# EAGLE board CPU (EAGLE 9.6.1)
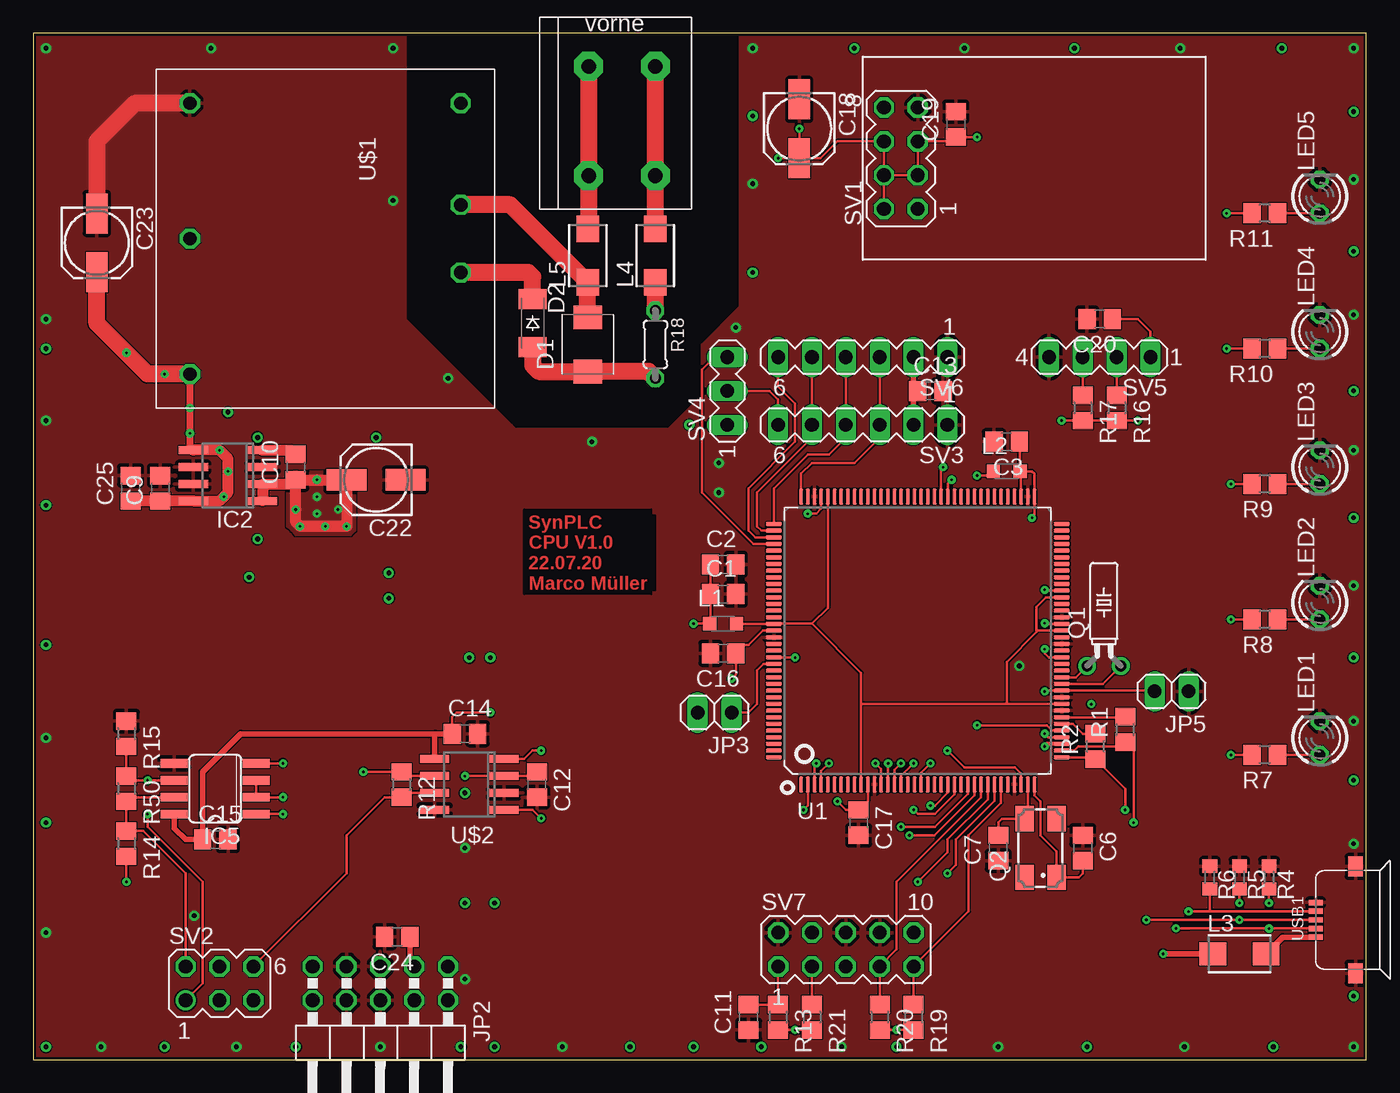
[diagram p0: board, top side]
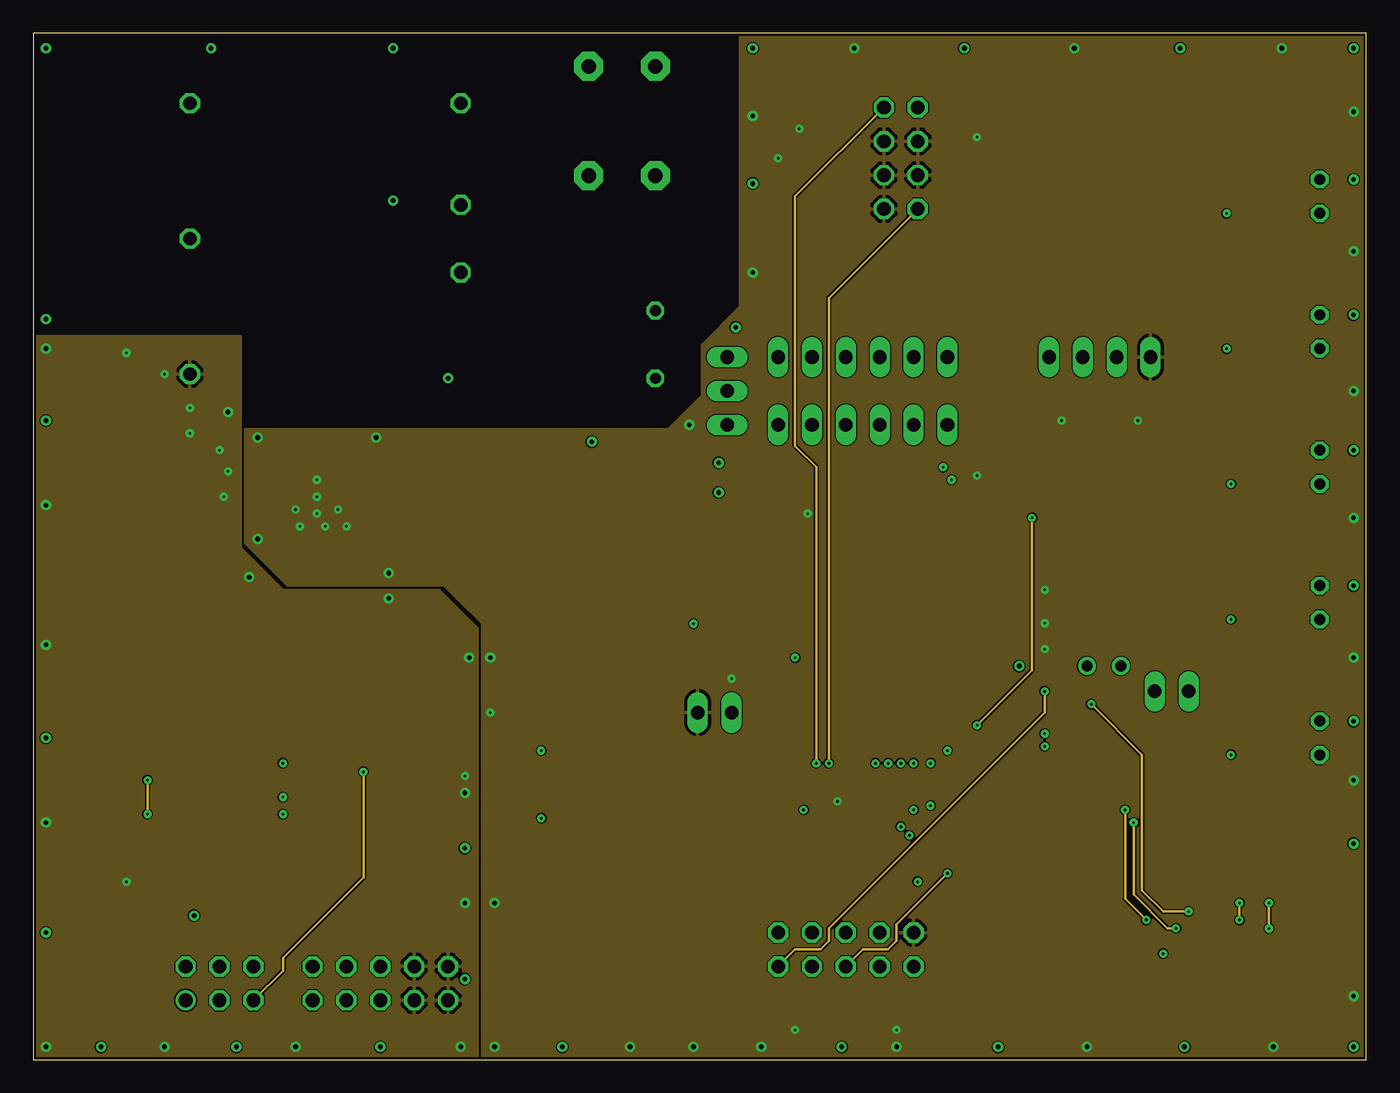
[diagram p1: board, inner layer Route2]
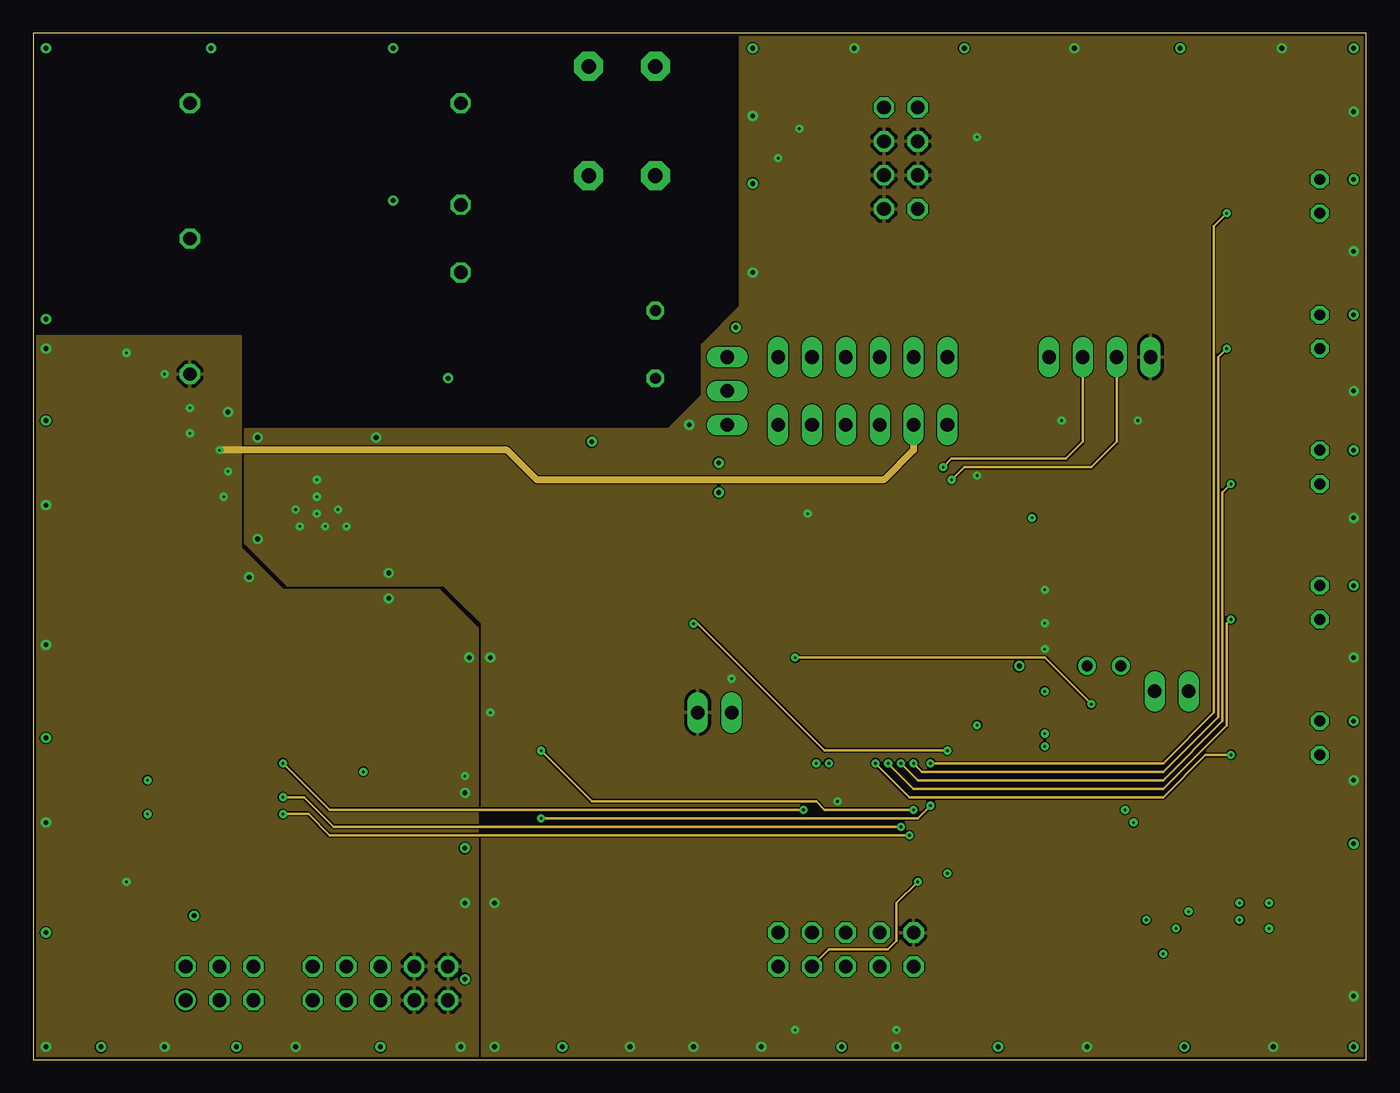
[diagram p2: board, inner layer Route15]
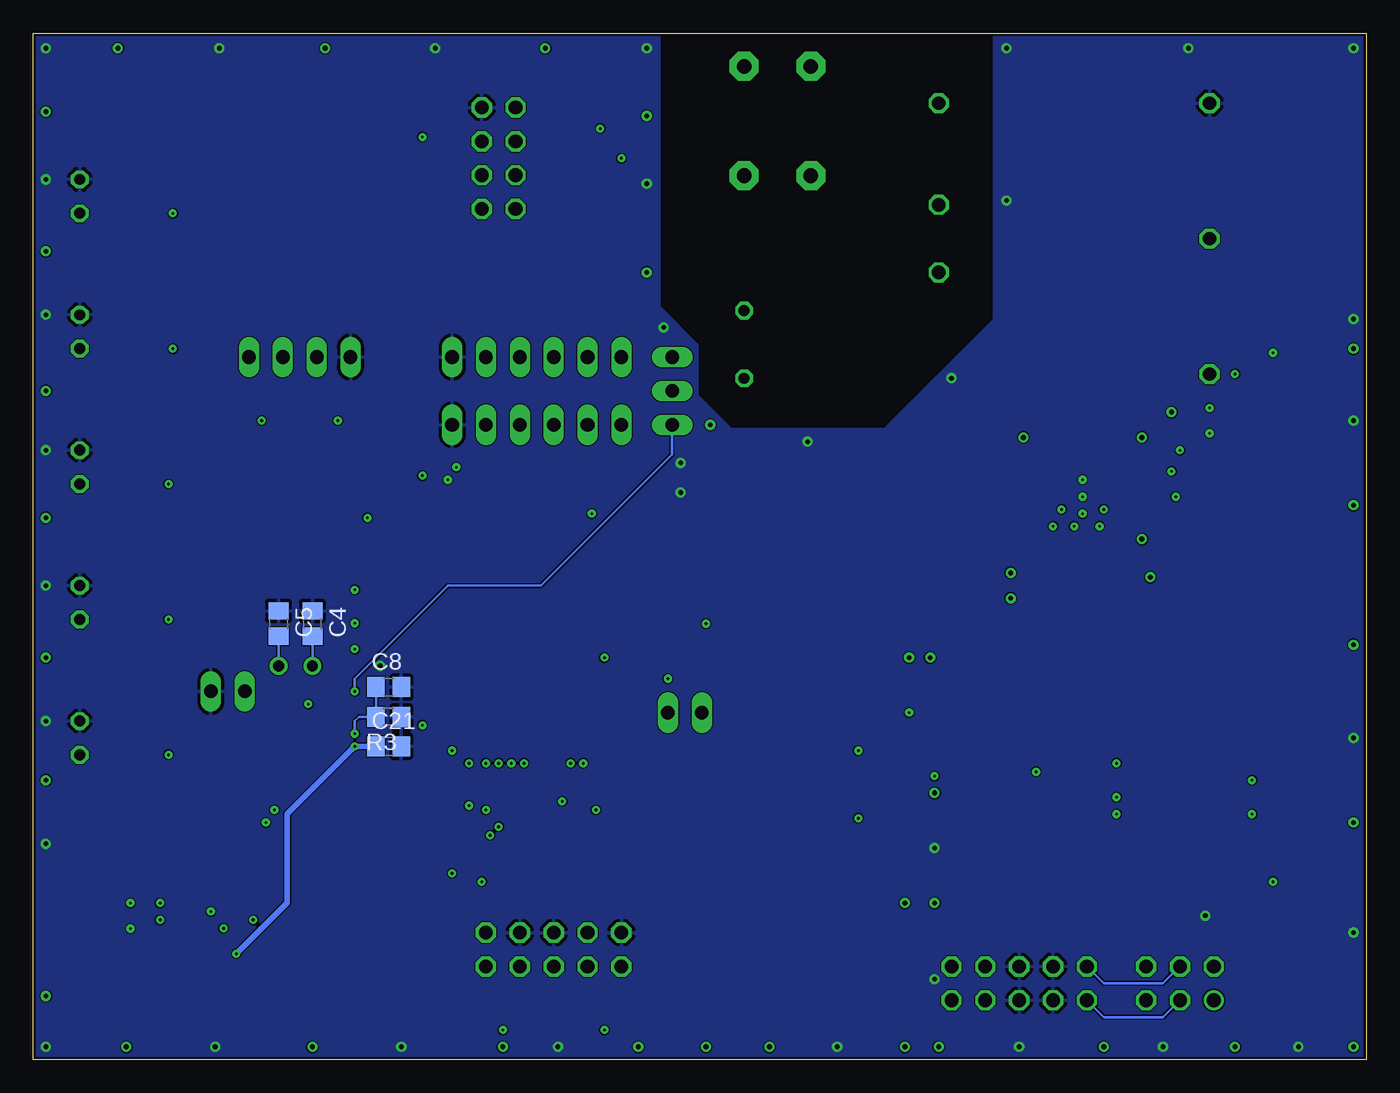
[diagram p3: board, bottom side, seen from below]

Size 100 x 77 mm. Coordinates in mm from the lower left corner, seen from the top.
Outline: 0,0 100,0 100,77 0,77 0,0
Copper layers (1+2*15+16): Top 0.035mm / dielectric 0.2mm / Route2 0.035mm / dielectric 1mm / Route15 0.035mm / dielectric 0.2mm / Bottom 0.035mm
Design rules "jlc *": minimum track width 3.5mil, minimum drill 0.2mm, track to track 3.5mil, track to pad 6mil, pad to pad 6mil, via to via 6mil, smd to smd 6mil, copper to edge 0.2mm, drill to drill 6mil, minimum pad ring 10mil, minimum via ring 8mil, stop-mask expansion 4mil, vias tented up to drill 0mil, thermal gap 10mil
tKeepout: 7 lines
tRestrict: 4 lines

## Footprints (pad centres in the part's own frame; a part is rotated, then mirrored left to right if it is on the bottom)
C0805 = smd 1.3 x 1.5: 1 -0.95,0; 2 0.95,0
153CLV-0505 = smd 3 x 1.6: + 2.2,0; - -2.2,0
SMBJ = smd 1.78 x 2.16: A 2.04,0; C -2.03,0
SOD-123_MINI-SMA = smd 1.5 x 2.1: A 1.8,0; C -1.8,0
SOIC8 = smd 0.6 x 2.2: 1 -1.905,-2.6; 2 -0.635,-2.6; 3 0.635,-2.6; 4 1.905,-2.6; 5 1.905,2.6; 6 0.635,2.6; 7 -0.635,2.6; 8 -1.905,2.6
SO08 = smd 0.66 x 2.032: 1 -1.905,-3.073; 2 -0.635,-3.073; 3 0.635,-3.073; 4 1.905,-3.073; 5 1.905,3.073; 6 0.635,3.073; 7 -0.635,3.073; 8 -1.905,3.073
2X05/90 = drill 1.016 octagon: 1 -5.08,-6.35; 2 -5.08,-3.81; 3 -2.54,-6.35; 4 -2.54,-3.81; 5 0,-6.35; 6 0,-3.81; 7 2.54,-6.35; 8 2.54,-3.81; 9 5.08,-6.35; 10 5.08,-3.81
1X02 = drill 1.016 long: 1 -1.27,0; 2 1.27,0
L2012C = smd 1 x 1: 1 -1,0; 2 1,0
SM-B5 = smd 2 x 1.7: 1 -2,0; 2 2,0
LED3MM = drill 0.813 octagon: A -1.27,0; K 1.27,0
TC26H = drill 0.813: 1 -1.27,0; 2 1.27,0
CTS406 = smd 1.9 x 1.4: 1 -2.2,-1.2; 2 2.2,-1.2; 3 2.2,1.2; 4 -2.2,1.2
R0805 = smd 1.3 x 1.5: 1 -0.95,0; 2 0.95,0
R0603 = smd 1 x 1.1: 1 -0.85,0; 2 0.85,0
0204/5 = drill 0.813 octagon: 1 -2.54,0; 2 2.54,0
MA04-2 = drill 1.016 octagon: 1 -3.81,-1.27; 2 -3.81,1.27; 3 -1.27,-1.27; 4 -1.27,1.27; 5 1.27,-1.27; 6 1.27,1.27; 7 3.81,-1.27; 8 3.81,1.27
MA03-2 = drill 1.016: 1 -2.54,-1.27 | drill 1.016 octagon: 2 -2.54,1.27; 3 0,-1.27; 4 0,1.27; 5 2.54,-1.27; 6 2.54,1.27
MA06-1 = drill 1.016 long: 1 -6.35,0; 2 -3.81,0; 3 -1.27,0; 4 1.27,0; 5 3.81,0; 6 6.35,0
MA03-1 = drill 1.016 long: 1 -2.54,0; 2 0,0; 3 2.54,0
MA04-1 = drill 1.016 long: 1 -3.81,0; 2 -1.27,0; 3 1.27,0; 4 3.81,0
MA05-2 = drill 1.016 octagon: 1 -5.08,-1.27; 2 -5.08,1.27; 3 -2.54,-1.27; 4 -2.54,1.27; 5 0,-1.27; 6 0,1.27; 7 2.54,-1.27; 8 2.54,1.27; 9 5.08,-1.27; 10 5.08,1.27
LQFP144-0.5-20X20M = smd 0.3 x 1.2: 1 -8.75,-10.8; 2 -8.25,-10.8; 3 -7.75,-10.8; 4 -7.25,-10.8; 5 -6.75,-10.8; 6 -6.25,-10.8; 7 -5.75,-10.8; 8 -5.25,-10.8; 9 -4.75,-10.8; 10 -4.25,-10.8; 11 -3.75,-10.8; 12 -3.25,-10.8; 13 -2.75,-10.8; 14 -2.25,-10.8; 15 -1.75,-10.8; 16 -1.25,-10.8; 17 -0.75,-10.8; 18 -0.25,-10.8; 19 0.25,-10.8; 20 0.75,-10.8; 21 1.25,-10.8; 22 1.75,-10.8; 23 2.25,-10.8; 24 2.75,-10.8; 25 3.25,-10.8; 26 3.75,-10.8; 27 4.25,-10.8; 28 4.75,-10.8; 29 5.25,-10.8; 30 5.75,-10.8; 31 6.25,-10.8; 32 6.75,-10.8; 33 7.25,-10.8; 34 7.75,-10.8; 35 8.25,-10.8; 36 8.75,-10.8; 73 8.75,10.8; 74 8.25,10.8; 75 7.75,10.8; 76 7.25,10.8; 77 6.75,10.8; 78 6.25,10.8; 79 5.75,10.8; 80 5.25,10.8; 81 4.75,10.8; 82 4.25,10.8; 83 3.75,10.8; 84 3.25,10.8; 85 2.75,10.8; 86 2.25,10.8; 87 1.75,10.8; 88 1.25,10.8; 89 0.75,10.8; 90 0.25,10.8; 91 -0.25,10.8; 92 -0.75,10.8; 93 -1.25,10.8; 94 -1.75,10.8; 95 -2.25,10.8; 96 -2.75,10.8; 97 -3.25,10.8; 98 -3.75,10.8; 99 -4.25,10.8; 100 -4.75,10.8; 101 -5.25,10.8; 102 -5.75,10.8; 103 -6.25,10.8; 104 -6.75,10.8; 105 -7.25,10.8; 106 -7.75,10.8; 107 -8.25,10.8; 108 -8.75,10.8 | smd 1.2 x 0.3: 37 10.8,-8.75; 38 10.8,-8.25; 39 10.8,-7.75; 40 10.8,-7.25; 41 10.8,-6.75; 42 10.8,-6.25; 43 10.8,-5.75; 44 10.8,-5.25; 45 10.8,-4.75; 46 10.8,-4.25; 47 10.8,-3.75; 48 10.8,-3.25; 49 10.8,-2.75; 50 10.8,-2.25; 51 10.8,-1.75; 52 10.8,-1.25; 53 10.8,-0.75; 54 10.8,-0.25; 55 10.8,0.25; 56 10.8,0.75; 57 10.8,1.25; 58 10.8,1.75; 59 10.8,2.25; 60 10.8,2.75; 61 10.8,3.25; 62 10.8,3.75; 63 10.8,4.25; 64 10.8,4.75; 65 10.8,5.25; 66 10.8,5.75; 67 10.8,6.25; 68 10.8,6.75; 69 10.8,7.25; 70 10.8,7.75; 71 10.8,8.25; 72 10.8,8.75; 109 -10.8,8.75; 110 -10.8,8.25; 111 -10.8,7.75; 112 -10.8,7.25; 113 -10.8,6.75; 114 -10.8,6.25; 115 -10.8,5.75; 116 -10.8,5.25; 117 -10.8,4.75; 118 -10.8,4.25; 119 -10.8,3.75; 120 -10.8,3.25; 121 -10.8,2.75; 122 -10.8,2.25; 123 -10.8,1.75; 124 -10.8,1.25; 125 -10.8,0.75; 126 -10.8,0.25; 127 -10.8,-0.25; 128 -10.8,-0.75; 129 -10.8,-1.25; 130 -10.8,-1.75; 131 -10.8,-2.25; 132 -10.8,-2.75; 133 -10.8,-3.25; 134 -10.8,-3.75; 135 -10.8,-4.25; 136 -10.8,-4.75; 137 -10.8,-5.25; 138 -10.8,-5.75; 139 -10.8,-6.25; 140 -10.8,-6.75; 141 -10.8,-7.25; 142 -10.8,-7.75; 143 -10.8,-8.25; 144 -10.8,-8.75
THN10WIR = drill 1 octagon: 1 15.24,22.86; 2 10.16,22.86; 3 2.54,22.86; 4 22.86,2.54; 5 12.7,2.54; 6 2.54,2.54
SO-08 = smd 0.6 x 2.2: 1 -1.905,-2.6; 2 -0.635,-2.6; 3 0.635,-2.6; 4 1.905,-2.6; 5 1.905,2.6; 6 0.635,2.6; 7 -0.635,2.6; 8 -1.905,2.6
MICRO-USB5+2P-SMD-0.65 = smd 0.4 x 1.05: 1 -1.3,0; 2 -0.65,0; 3 0,0; 4 0.65,0; 5 1.3,0 | smd 1.5 x 1.1: 6 4,-3; 7 -4,-3
SPT2 = drill 1.1 pad 2.184 octagon: 1.1 7.3,10.7; 1.2 7.3,2.5; 2.1 2.3,10.7; 2.2 2.3,2.5

## Placement (x,y rotation side)
C1  100n  [C0805]  51.75,34.92 0 top
C2  10µ  [C0805]  51.75,37.15 0 top
C3  100n  [C0805]  73.03,46.35 180 top
C4  22p  [C0805]  79.06,32.7 270 bottom
C5  22p  [C0805]  81.6,32.7 270 bottom
C6  22p  [C0805]  78.74,15.88 270 top
C7  22p  [C0805]  72.39,15.88 90 top
C8  22p  [C0805]  73.34,27.94 0 bottom
C9  1µ  [C0805]  9.53,42.86 90 top
C10  100n  [C0805]  19.68,44.45 90 top
C11  100n  [C0805]  53.66,3.17 90 top
C12  100n  [C0805]  37.78,20.64 270 top
C13  100n  [C0805]  67.31,50.16 0 top
C14  100n  [C0805]  32.38,24.45 0 top
C15  100n  [C0805]  13.65,16.51 0 top
C16  100n  [C0805]  51.75,30.48 180 top
C17  100n  [C0805]  61.91,17.78 270 top
C18  100µ  [153CLV-0505]  57.47,69.85 270 top
C19  100n  [C0805]  69.22,70.17 90 top
C20  100n  [C0805]  80.01,55.56 180 top
C21  100n  [C0805]  73.34,23.5 0 bottom
C22  100µ  [153CLV-0505]  25.72,43.5 180 top
C23  100µ  [153CLV-0505]  4.76,61.28 270 top
C24  100n  [C0805]  27.3,9.21 180 top
C25  100n  [C0805]  7.3,42.86 90 top
D1  [SMBJ]  41.59,53.66 90 top
D2  CGRM4001-G  [SOD-123_MINI-SMA]  37.47,55.24 270 top
IC2  LT1763CS8-3.3  [SOIC8]  14.61,43.81 90 top
IC5  MAX485CSA  [SO08]  13.65,20.32 90 top
JP2  [2X05/90]  26.04,0.64 180 top
JP3  [1X02]  51.12,26.04 180 top
JP5  [1X02]  85.41,27.62 180 top
L1  MH2029-300Y  [L2012C]  51.75,32.7 0 top
L2  MH2029-300Y  [L2012C]  73.03,44.13 0 top
L3  [SM-B5]  90.49,7.94 0 top
L4  [SM-B5]  46.67,60.33 90 top
L5  [SM-B5]  41.59,60.33 90 top
LED1  [LED3MM]  96.52,24.13 90 top
LED2  [LED3MM]  96.52,34.29 90 top
LED3  [LED3MM]  96.52,44.45 90 top
LED4  [LED3MM]  96.52,54.61 90 top
LED5  [LED3MM]  96.52,64.77 90 top
Q1  428-200125-PL08  [TC26H]  80.33,29.53 0 top
Q2  406I35E12M00000  [CTS406]  75.56,15.88 90 top
R1  39R 1%  [R0805]  81.92,24.77 90 top
R2  39R 1%  [R0805]  79.69,23.5 90 top
R3  6k8 1%  [R0805]  73.34,25.72 180 bottom
R4  CG0603MLC-05E  [R0603]  92.71,13.65 270 top
R5  CG0603MLC-05E  [R0603]  90.49,13.65 270 top
R6  CG0603MLC-05E  [R0603]  88.27,13.65 270 top
R7  220  [R0805]  92.39,22.86 180 top
R8  220  [R0805]  92.39,33.02 180 top
R9  220  [R0805]  92.39,43.18 180 top
R10  220  [R0805]  92.39,53.34 180 top
R11  220  [R0805]  92.39,63.5 180 top
R12  120  [R0805]  27.62,20.64 270 top
R13  10k  [R0805]  55.88,3.17 270 top
R14  330  [R0805]  6.99,16.19 270 top
R15  330  [R0805]  6.99,24.45 270 top
R16  3k3  [R0805]  81.28,48.9 270 top
R17  3k3  [R0805]  78.74,48.9 270 top
R18  60R065XU  [0204/5]  46.67,53.66 270 top
R19  100k  [R0805]  66.04,3.17 270 top
R20  100k  [R0805]  63.5,3.17 270 top
R21  100k  [R0805]  58.42,3.17 270 top
R50  150  [R0805]  6.99,20.32 270 top
SV1  ESP01  [MA04-2]  65.09,67.63 90 top
SV2  [MA03-2]  13.97,5.71 0 top
SV3  [MA06-1]  62.23,47.62 180 top
SV4  [MA03-1]  52.07,50.16 90 top
SV5  [MA04-1]  80.01,52.7 180 top
SV6  [MA06-1]  62.23,52.7 180 top
SV7  [MA05-2]  60.96,8.26 0 top
U1  ATSAM3X8EA-AU-ND-LQFP144  [LQFP144-0.5-20X20M]  66.36,31.43 0 top
U$1  THN_10WIR  [THN10WIR]  9.21,74.3 270 top
U$2  TCAN1044VDRQ1  [SO-08]  32.7,20.64 90 top
USB1  ST-USB-001L  [MICRO-USB5+2P-SMD-0.65]  96.2,10.48 90 top
X1  SPT2.5/2-H-5.0  [SPT2]  39.37,63.82 0 top

## Library data of the parts
C1-C25 = rcl; SPICEPREFIX: C
D1 D2 = diode
IC2 = linear-technology; MPN: LT1763CS8-3.3; OC_FARNELL: 1273617; OC_NEWARK: 57M6055
IC5 = maxim; MF: MAXIM; MPN: MAX481CSA; OC_FARNELL: unknown; OC_NEWARK: 90C3817
JP2 JP3 JP5 = pinhead
L1 L2 = rcl; SPICEPREFIX: L
L3-L5 = inductor-neosid; OC_FARNELL: unknown; OC_NEWARK: unknown
LED1-LED5 = led
Q1 Q2 = crystal; OC_FARNELL: unknown; OC_NEWARK: unknown
R1-R21 R50 = rcl; SPICEPREFIX: R
SV1-SV7 = con-lstb; OC_FARNELL: unknown; OC_NEWARK: unknown
U1 = Seeed-OPL-ic; MPN: ATSAM3X8EA-AU-ND
U$1 = traco-electronic
U$2 = texas
USB1 = Seeed-OPL-Connector; MPN: ST-USB-001L
X1 = con-phoenix-500

## Nets
0V: D1.A L5.1 U$1.2
4_/CS: SV4.3 U1.112
10_/CS1: SV6.6 U1.111
24V: D2.C U$1.1
25_BOOT: R7.2 U1.13
26_ERROR: R8.2 U1.14
27_RUN: R9.2 U1.15
28_HEARTBEAT: R10.2 U1.16
29_FLASH: R11.2 U1.19
+3V3: C10.1 C14.1 C15.1 C16.1 C17.1 C18.+ C19.1 C20.1 C22.+ IC2.1 IC2.2 IC5.8 JP3.2 L2.1 R13.2 R16.2 R17.2 R19.2 R20.2 R21.2 SV1.2 SV1.3 SV1.4 SV1.5 SV1.6 SV5.1 SV7.10 U1.11 U1.52 U1.57 U1.62 U1.105 U1.125 U$2.5
+5V: C9.1 C12.1 C13.1 C23.+ C24.1 C25.1 IC2.5 IC2.8 JP2.1 JP2.2 JP2.3 JP2.4 R14.2 SV3.2 SV6.2 U$1.4 U$2.3
B+: IC5.7 R14.1 R50.2 SV2.2
B-: IC5.6 R15.2 R50.1 SV2.1
BUS+: JP2.9 SV2.4
BUS-: JP2.10 SV2.3
CANH: R12.2 SV2.6 U$2.7
CANL: R12.1 SV2.5 U$2.6
CANRX: U1.24 U$2.4
CANTX: U1.23 U$2.1
CS: SV3.6 SV4.2
D+: R2.1 R5.2 U1.37 USB1.3
D-: R1.1 R4.2 U1.38 USB1.2
DIR: IC5.2 IC5.3 U1.26
ESPRX: SV1.8 U1.3
ESPTX: SV1.1 U1.4
GND: C1.2 C2.2 C3.2 C4.1 C5.1 C6.1 C7.1 C8.2 C9.2 C11.1 C12.2 C13.2 C14.2 C15.2 C16.2 C17.2 C18.- C19.2 C20.2 C21.2 C22.- C23.- C24.2 C25.2 IC2.3 IC2.6 IC2.7 IC5.5 JP2.5 JP2.6 JP2.7 JP2.8 JP5.1 LED1.K LED2.K LED3.K LED4.K LED5.K R3.1 R4.1 R5.1 R6.1 R15.1 SV1.7 SV3.1 SV5.4 SV6.1 SV7.2 SV7.6 SV7.8 U1.12 U1.33 U1.44 U1.46 U1.54 U1.58 U1.74 U1.106 U1.126 U$1.6 U$2.2 U$2.8 USB1.5 USB1.6 USB1.7
ID: R6.2 U1.129 USB1.4
MISO: SV3.3 SV6.3 U1.108
MOSI: SV3.4 SV6.4 U1.109
N$1: L1.2 U1.10 U1.45 U1.56 U1.61 U1.104 U1.124
N$2: C1.1 C2.1 L1.1 U1.34
N$3: C3.1 L2.2 U1.41 U1.73 U1.75
N$4: C5.2 Q1.2 U1.48
N$5: C4.2 Q1.1 U1.49
N$6: C8.1 R3.2 U1.40
N$7: JP3.1 U1.130
N$8: C10.2 IC2.4
N$9: C7.2 Q2.3 U1.35
N$10: C6.2 Q2.1 U1.36
N$11: LED1.A R7.1
N$12: LED2.A R8.1
N$13: R2.2 U1.42
N$14: R1.2 U1.43
N$15: LED3.A R9.1
N$16: LED4.A R10.1
N$17: LED5.A R11.1
N$18: L3.2 USB1.1
N$19: L4.2 X1.1.1 X1.1.2
N$20: L5.2 X1.2.1 X1.2.2
N$21: L4.1 R18.1
N$22: D1.C D2.A R18.2
RESET: C11.2 JP5.2 R13.1 SV4.1 SV7.1 U1.47
RXD: IC5.1 U1.27
SCK: SV3.5 SV6.5 U1.110
SCL: R17.1 SV5.3 U1.87
SDA: R16.1 SV5.2 U1.86
TCK: R20.1 SV7.7 U1.28
TDI: R21.1 SV7.3 U1.29
TDO: SV7.5 U1.30
TMS: R19.1 SV7.9 U1.31
TXD: IC5.4 U1.2
VBUS: C21.1 L3.1 U1.39

## Tracks (layer width: path | path; a pad name or v marks a point on that pad's centre or on a via)
0V
  Top 1.27: D1.A L5.1 35.78,64.14 U$1.2
4_/CS
  Top 0.203: U1.112 54.03,38.68 50.16,42.55 50.16,51.75 51.12,52.7 SV4.3
10_/CS1
  Top 0.203: U1.111 54.16,39.18 53.66,39.69 53.66,42.86 57.15,46.35 57.15,49.21 55.88,50.48 SV6.6
24V
  Top 1.27: D2.C 37.47,58.74 37.15,59.05 U$1.1
25_BOOT  (via drill 0.2)
  Top 0.203: U1.13 63.61,21.8 v63.18,22.23 | v89.85,22.86 R7.2
  Route15 0.203: v63.18,22.23 65.72,19.68 84.77,19.68 87.95,22.86 v89.85,22.86
26_ERROR  (via drill 0.2)
  Top 0.203: U1.14 64.11,22.2 v64.14,22.23 | v89.85,33.02 R8.2
  Route15 0.203: v64.14,22.23 66.04,20.32 84.77,20.32 89.53,25.08 89.53,32.7 v89.85,33.02
27_RUN  (via drill 0.2)
  Top 0.203: v65.09,22.23 64.61,21.75 U1.15 | v89.85,43.18 R9.2
  Route15 0.203: v65.09,22.23 66.36,20.95 84.77,20.95 89.22,25.4 89.22,42.55 v89.85,43.18
28_HEARTBEAT  (via drill 0.2)
  Top 0.203: U1.16 65.11,21.29 v66.04,22.23 | v89.53,53.34 R10.2
  Route15 0.203: v66.04,22.23 66.67,21.59 84.77,21.59 88.9,25.72 88.9,52.7 v89.53,53.34
29_FLASH  (via drill 0.2)
  Top 0.203: U1.19 66.61,21.52 v67.31,22.23 | v89.53,63.5 R11.2
  Route15 0.203: v67.31,22.23 84.77,22.23 88.58,26.04 88.58,62.55 v89.53,63.5
+3V3  (via drill 0.2, 0.35)
  Top 0.203: SV5.1 83.82,54.61 82.87,55.56 C20.1 | SV1.4 SV1.6 60.33,68.9 59.05,67.63 57.49,67.63 C18.+ | SV1.4 SV1.3 SV1.5 68.89,68.9 C19.1 v70.8,69.22 | SV1.2 SV1.4 | U1.125 54.73,32.18 53.66,31.11 53.02,31.11 52.7,30.8 C16.1 52.7,28.89 v52.39,28.57 | U1.11 62.61,19.43 C17.1 60.96,18.73 v60.33,19.37 | 30.1,24.39 30.16,24.45 | C14.1 31.43,25.72 31.75,26.04 v34.29,26.04 | U1.105 59.11,41.33 58.74,40.96 v58.1,40.96 | L2.1 71.71,43.81 v70.8,43.81 | R17.2 | R17.2 v77.15,47.94 | R17.2 R16.2 v82.86,47.95 v82.87,47.94 | C18.+ 57.45,67.63 v55.88,67.63 | C18.+ v57.47,69.85 | U1.62 75.94,35.18 v75.88,35.24 | U1.52 76.18,30.18 75.88,30.48 v75.88,30.8 | U1.57 75.94,32.68 v75.88,32.74 | R19.2 v64.77,2.23 R20.2 | R13.2 v57.15,2.23 R21.2
  Top 0.406: IC5.8 10.58,17.36 11.43,16.51 C15.1 12.7,21.59 15.56,24.45 30.16,24.45 C14.1 | U$2.5 30.1,24.39
  Top 0.813: C10.1 19.36,43.18 IC2.2 IC2.1 | C10.1 v21.27,43.5 C22.+ 23.52,40.03 v23.5,40.01 v21.91,40.01 v20,40.01 19.68,40.32 v19.68,41.27 C10.1
  other vias: 21.27,40.96 22.86,41.27 21.27,42.23 49.53,0.95 34.61,0.95 34.61,11.75 34.29,30.16 26.67,36.51 16.83,39.05 25.72,46.67 16.83,46.67 49.21,47.62 53.98,59.05 53.98,70.8 61.59,75.88 78.11,75.88 93.66,75.88 99.06,71.12 99.06,60.64 99.06,50.16 99.06,40.64 99.06,30.16 99.06,20.95 99.06,4.76 93.03,0.95 79.06,0.95 64.77,0.95 54.61,0.95 44.77,0.95
  pour Route2: 15.88,47.31 39.37,47.31 47.62,47.31 50.16,49.85 50.16,53.66 53.02,56.52 53.02,76.83 100.01,76.83 100.01,0 33.66,0 33.66,32.7 31.75,34.61 30.8,35.56 21.27,35.56 19.05,35.56 15.88,38.73
  pour Route15: 15.88,47.31 39.37,47.31 47.62,47.31 50.16,49.85 50.16,53.66 53.02,56.52 53.02,76.83 100.01,76.83 100.01,0 33.66,0 33.66,32.7 31.75,34.61 30.8,35.56 21.27,35.56 19.05,35.56 15.88,38.73
  pour Top: 19.05,43.81 19.05,40.01 19.37,39.69 19.68,39.37 23.81,39.37 24.13,39.69 24.13,42.23 24.13,43.81 23.81,44.13 19.37,44.13
+5V  (via drill 0.2, 0.35)
  Top 0.203: C12.1 37.47,21.27 U$2.3 v32.38,21.27 | R14.2 v6.99,13.34
  Top 0.406: SV3.2 66.04,49.84 C13.1 66.04,50.48 SV6.2 | JP2.3 28.25,7.3 C24.1
  Top 0.508: R14.2 | U$1.4 11.75,45.98 IC2.5
  Top 0.813: C25.1 C9.1 IC2.8 13.97,41.91 14.61,42.55 14.61,45.09 v13.97,45.72 IC2.5
  Top 1.27: U$1.4 8.57,51.44 4.76,55.24 C23.+
  Route15 0.508: SV3.2 66.04,45.72 63.82,43.5 37.78,43.5 35.56,45.72 v13.97,45.72
  other vias: 14.61,44.13 14.29,42.23 11.75,46.99 11.75,48.9 9.84,51.44 6.99,53.02 0.95,0.95 9.84,0.95 19.68,0.95 32.07,0.95 32.38,11.75 32.38,20 32.7,30.16 26.67,34.61 16.19,36.2 14.61,48.58 0.95,53.34 0.95,17.78 0.95,31.11 0.95,41.59
  pour Route15 (rank 6): 15.56,54.29 0,54.29 0,0 33.34,0 33.34,32.38 30.48,35.24 18.73,35.24 15.56,38.42
  pour Route2 (rank 6): 15.56,54.29 0,54.29 0,0 33.34,0 33.34,32.38 30.48,35.24 18.73,35.24 15.56,38.42
B+
  Top 0.203: IC5.7 7.3,19.68 R50.2 R14.1 8.26,17.14 11.43,13.97 SV2.2
B-  (via drill 0.2)
  Top 0.203: R15.2 R50.1 | R50.1 | IC5.6 v8.57,20.95 7.3,20.95 R50.1 | SV2.1 12.7,5.71 12.7,13.34 8.57,17.46 v8.57,18.41
  Route2 0.203: v8.57,18.41 v8.57,20.95
BUS+
  Bottom 0.203: SV2.4 15.24,5.71 19.68,5.71 JP2.9
BUS-
  Bottom 0.203: SV2.3 15.24,3.17 19.68,3.17 JP2.10
CANH
  Top 0.203: U$2.7 27.94,20 R12.2 26.35,19.69 23.5,16.83 23.5,13.97 SV2.6
CANL  (via drill 0.2)
  Top 0.203: v24.77,21.59 R12.1 27.94,21.27 U$2.6
  Route2 0.203: v24.77,21.59 24.77,13.65 18.73,7.62 18.73,6.67 SV2.5
CANRX  (via drill 0.2)
  Top 0.203: U1.24 69.11,19.89 67.63,18.41 66.36,18.41 v66.04,18.73 | v38.1,23.18 37.47,23.18 36.83,22.54 U$2.4
  Route15 0.203: v66.04,18.73 59.37,18.73 58.74,19.37 41.91,19.37 v38.1,23.18
CANTX  (via drill 0.2)
  Top 0.203: U1.23 68.61,20.03 67.63,19.05 v67.31,19.05 | v38.1,18.1 37.47,18.73 U$2.1
  Route15 0.203: v67.31,19.05 66.36,18.1 v38.1,18.1
CS
  Top 0.203: SV3.6 55.88,49.53 55.24,50.16 SV4.2
D+  (via drill 0.2)
  Top 0.203: U1.37 79.56,22.68 R2.1 81.92,20.32 v81.92,18.73 | USB1.3 v90.49,10.48 v83.5,10.48 | R5.2 v90.49,11.75
  Route2 0.203: v90.49,11.75 v90.49,10.48 | v81.92,18.73 81.92,12.06 v83.5,10.48
D-  (via drill 0.2)
  Top 0.203: U1.38 78.11,23.18 78.42,23.5 81.59,23.5 R1.1 82.55,23.18 v82.55,17.78 | USB1.2 v92.71,9.83 86.69,9.83 86.68,9.84 v85.72,9.84 | R4.2 v92.71,11.75
  Route2 0.203: v92.71,11.75 v92.71,9.83 | v82.55,17.78 82.55,12.38 85.09,9.84 v85.72,9.84
DIR  (via drill 0.2)
  Top 0.203: IC5.3 IC5.2 v18.73,19.68 | v65.09,17.46 67.63,17.46 70.11,19.94 U1.26
  Route15 0.203: v65.09,17.46 22.54,17.46 20.32,19.68 v18.73,19.68
ESPRX  (via drill 0.2)
  Top 0.203: U1.3 58.61,22.09 v58.74,22.23
  Route2 0.203: v58.74,22.23 58.74,25.4 58.74,44.45 57.15,46.04 57.15,64.77 SV1.8
ESPTX  (via drill 0.2)
  Top 0.203: U1.4 59.11,21.64 v59.69,22.23
  Route2 0.203: SV1.1 59.69,57.15 v59.69,22.23
GND  (via drill 0.35)
  Top 1.27: U$1.6 7.62,71.75 4.76,68.9 C23.-
  other vias: 0.95,24.13 0.95,9.53 5.08,0.95 15.24,0.95 26.04,0.95 32.38,6.03 32.38,15.88 0.95,47.94 0.95,55.56 0.95,75.88 13.34,75.88 26.99,75.88 26.99,64.45 31.11,51.12 41.91,46.35 52.7,54.93 53.98,65.72 53.98,75.88 69.85,75.88 86.04,75.88 99.06,75.88 99.06,66.04 99.06,55.88 99.06,45.72 99.06,35.56 99.06,25.4 99.06,16.19 99.06,0.95 86.36,0.95 72.39,0.95 60.64,0.95 39.69,0.95 51.44,44.77 51.44,42.55 73.98,29.53 12.06,10.79
  pour Top (rank 6): 0,0 0,76.83 27.94,76.83 27.94,55.56 35.88,47.62 36.2,47.31 44.13,47.31 47.62,47.31 49.53,49.21 50.16,49.85 50.16,53.66 53.02,56.52 53.02,58.1 53.02,77.15 100.01,77.15 100.01,0
  pour Bottom: 0,0 0,76.83 27.94,76.83 27.94,55.56 36.2,47.31 47.62,47.31 49.53,49.21 50.16,49.85 50.16,53.66 53.02,56.52 53.02,77.15 100.01,77.15 100.01,0
ID  (via drill 0.2)
  Top 0.203: USB1.4 96.19,11.11 88.27,11.11 | 88.27,11.11 v86.68,11.11 | R6.2 88.27,11.11 | U1.129 57.13,30.18 v57.15,30.16
  Route2 0.203: v79.38,26.67 83.19,22.86 83.19,12.7 84.77,11.11 v86.68,11.11
  Route15 0.203: v57.15,30.16 75.88,30.16 v79.38,26.67
MISO
  Top 0.203: SV6.3 SV3.3 63.5,46.67 61.59,44.77 58.42,44.77 57.61,43.95 U1.108
MOSI
  Top 0.203: SV6.4 SV3.4 60.96,46.67 59.69,45.4 58.1,45.4 55.56,42.86 U1.109
N$1
  Top 0.203: L1.2 52.77,32.68 U1.124 55.58,32.7 58.42,32.7 | U1.10 62.11,26.67 | 62.11,26.67 62.11,29.02 58.42,32.7 | U1.45 73.03,26.68 | 73.03,26.68 62.12,26.68 62.11,26.67 | U1.56 75.25,32.18 | 75.25,32.18 75.25,33.97 75.96,34.68 U1.61 | 73.03,26.68 73.03,29.84 75.25,32.07 75.25,32.18 | U1.104 59.61,33.89 58.42,32.7
N$2  (via drill 0.2)
  Top 0.203: C2.1 C1.1 50.8,32.75 L1.1 v49.53,32.7 | U1.34 74.11,21.46 73.66,21.91 69.85,21.91 v68.58,23.18
  Route15 0.203: v68.58,23.18 59.37,23.18 49.85,32.7 v49.53,32.7
N$3  (via drill 0.2)
  Top 0.203: U1.75 74.11,44.05 | 74.11,44.05 L2.2 74.03,46.3 C3.1 | 74.11,44.05 74.19,44.13 74.93,44.13 75.11,43.95 U1.73 75.11,40.82 v74.93,40.64 | v70.8,25.08 76.03,25.08 76.44,24.68 U1.41
  Route2 0.203: v74.93,40.64 74.93,29.21 v70.8,25.08
N$4
  Top 0.203: U1.48 80.25,28.18 Q1.2
  Bottom 0.203: Q1.2 C5.2
N$5
  Top 0.203: U1.49 78.21,28.68 Q1.1
  Bottom 0.203: Q1.1 C4.2
N$6  (via drill 0.2)
  Top 0.203: U1.40 76.15,24.18 v75.88,24.45
  Bottom 0.203: v75.88,24.45 75.88,25.4 75.56,25.72 R3.2 C8.1
N$7
  Top 0.203: U1.130 54.77,29.68 54.29,29.21 54.29,26.67 53.66,26.04 JP3.1
N$8
  Top 0.813: IC2.4 19.36,45.72 C10.2
N$9
  Top 0.203: C7.2 72.39,17.78 72.69,18.07 Q2.3 74.61,18.32 U1.35
N$10
  Top 0.203: C6.2 78.74,13.97 78.44,13.68 Q2.1 76.77,15.63 75.56,16.83 75.56,19.37 75.11,19.82 U1.36
N$11
  Top 0.203: R7.1 LED1.A
N$12
  Top 0.203: R8.1 LED2.A
N$13
  Top 0.203: U1.42 78,25.18 78.74,24.45 R2.2
N$14
  Top 0.203: U1.43 81.88,25.68 R1.2
N$15
  Top 0.203: R9.1 LED3.A
N$16
  Top 0.203: R10.1 LED4.A
N$17
  Top 0.203: R11.1 LED5.A
N$18
  Top 0.406: L3.2 93.73,9.18 USB1.1
N$19
  Top 1.27: L4.2 X1.1.2 X1.1.1
N$20
  Top 1.27: X1.2.1 X1.2.2 41.67,62.4 L5.2
N$21
  Top 1.27: R18.1 L4.1
N$22
  Top 1.27: D2.A 37.47,52.07 37.91,51.63 D1.C 46.16,51.63 R18.2
RESET  (via drill 0.2)
  Top 0.203: SV7.1 R13.1 C11.2 | JP5.2 84.08,27.68 U1.47 75.94,27.68 v75.88,27.62
  Route2 0.203: SV7.1 57.15,8.26 59.05,8.26 59.69,8.89 59.69,9.84 75.88,26.04 v75.88,27.62
  Bottom 0.203: v75.88,27.62 75.88,28.57 68.9,35.56 61.91,35.56 52.07,45.4 SV4.1
RXD  (via drill 0.2)
  Top 0.203: U1.27 70.61,19.81 67.62,16.82 v65.73,16.82 | v18.73,18.41 IC5.1
  Route15 0.203: v65.73,16.82 22.23,16.82 20.64,18.41 v18.73,18.41
SCK
  Top 0.203: SV6.5 SV3.5 58.42,46.67 54.29,42.55 54.29,40.01 54.62,39.68 U1.110
SCL  (via drill 0.2)
  Top 0.203: R17.1 SV5.3 | U1.87 68.11,44.3 v68.26,44.45
  Route15 0.203: v68.26,44.45 68.9,45.09 77.47,45.09 78.74,46.35 SV5.3
SDA  (via drill 0.2)
  Top 0.203: R16.1 SV5.2 | U1.86 68.61,43.21 v68.9,43.5
  Route15 0.203: v68.9,43.5 69.85,44.45 79.38,44.45 81.28,46.35 SV5.2
TCK
  Top 0.203: R20.1 SV7.7 64.77,8.26 64.77,13.34 71.11,19.67 U1.28
TDI  (via drill 0.2)
  Top 0.203: R21.1 SV7.3 | v66.36,13.34 68.58,15.56 68.58,16.51 71.61,19.54 U1.29
  Route15 0.203: SV7.3 59.69,8.26 64.14,8.26 64.77,8.89 64.77,11.75 v66.36,13.34
TDO  (via drill 0.2)
  Top 0.203: v68.58,13.97 69.22,14.61 69.22,16.51 72.11,19.4 U1.30
  Route2 0.203: SV7.5 62.23,8.26 64.14,8.26 64.77,8.89 64.77,10.16 v68.58,13.97
TMS
  Top 0.203: R19.1 SV7.9 70.17,11.11 70.17,16.83 72.61,19.27 U1.31
TXD  (via drill 0.2)
  Top 0.203: U1.2 58.11,19.05 v57.78,18.73 | v18.73,22.23 IC5.4
  Route15 0.203: v57.78,18.73 22.23,18.73 v18.73,22.23
VBUS  (via drill 0.2)
  Top 0.305: U1.39 76.07,23.68 v75.88,23.5
  Top 0.406: v84.77,7.94 L3.1
  Bottom 0.406: C21.1 v75.88,23.5 80.96,18.41 80.96,11.75 v84.77,7.94

## Text on the board
Top: SynPLC / CPU V1.0 / 22.07.20 / Marco Müller